# Altium PCB EX384.PcbDoc (part 1 of 2)
Units mil, origin at the board's own origin, x right, y up, seen from the top; angles counter-clockwise.
Board outline 2480 x 4575 mil, 2 copper layers (Top Layer, Bottom Layer), stack 64.8 mil thick; 53 components, 56 nets, 194 pads, 19 vias.
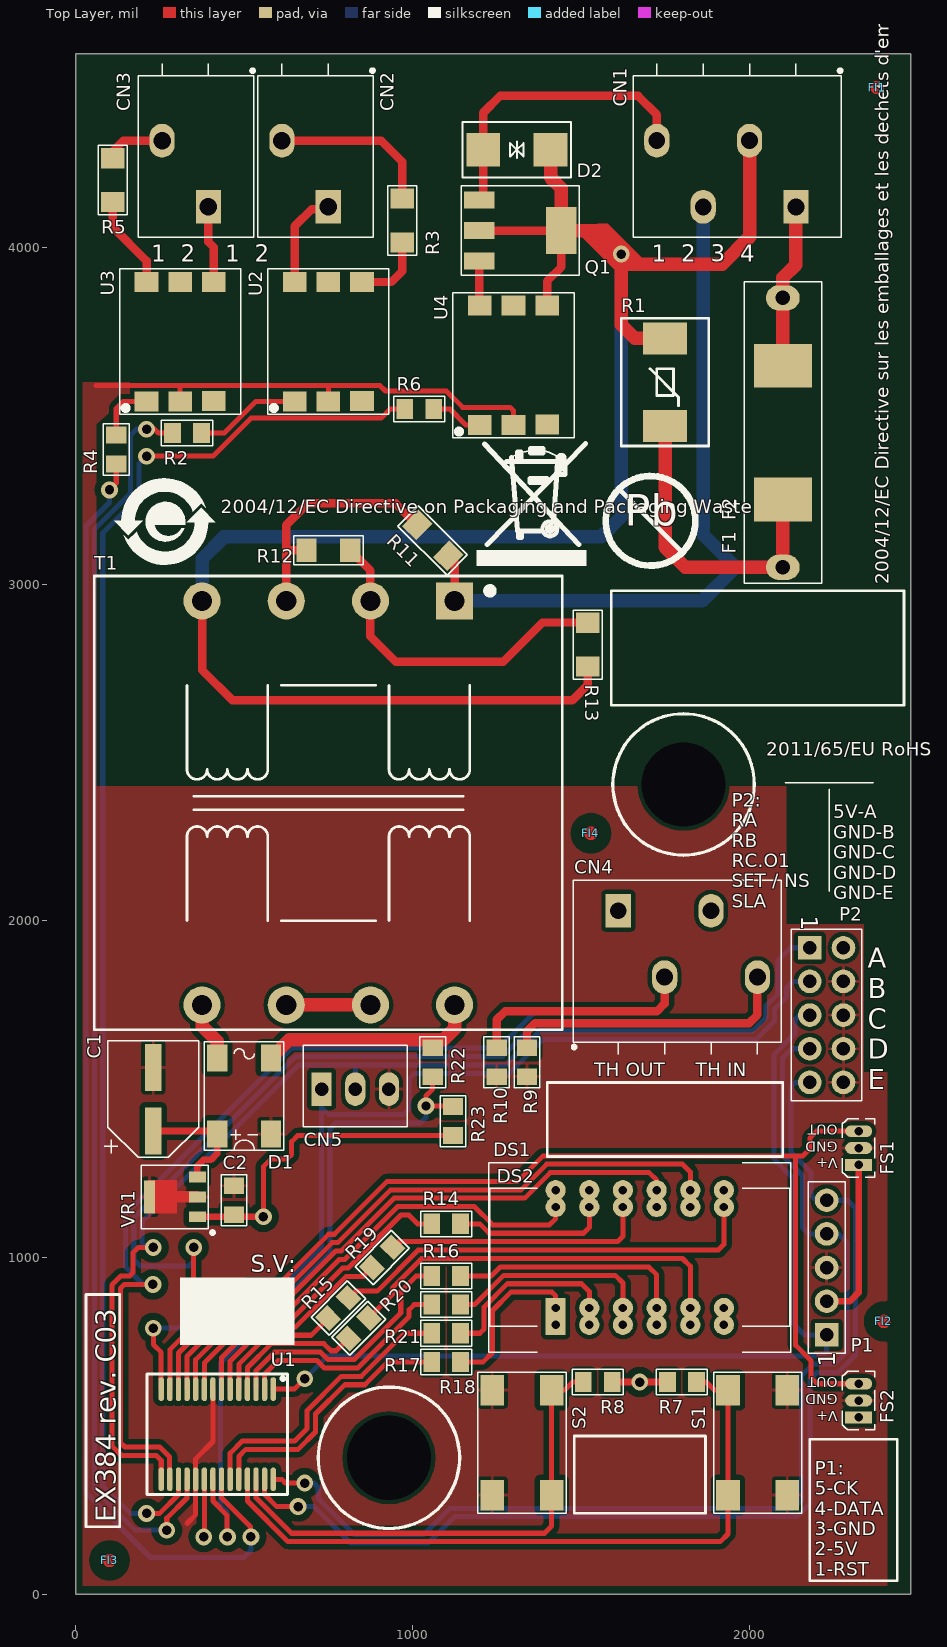
[diagram p0: Top Layer view]
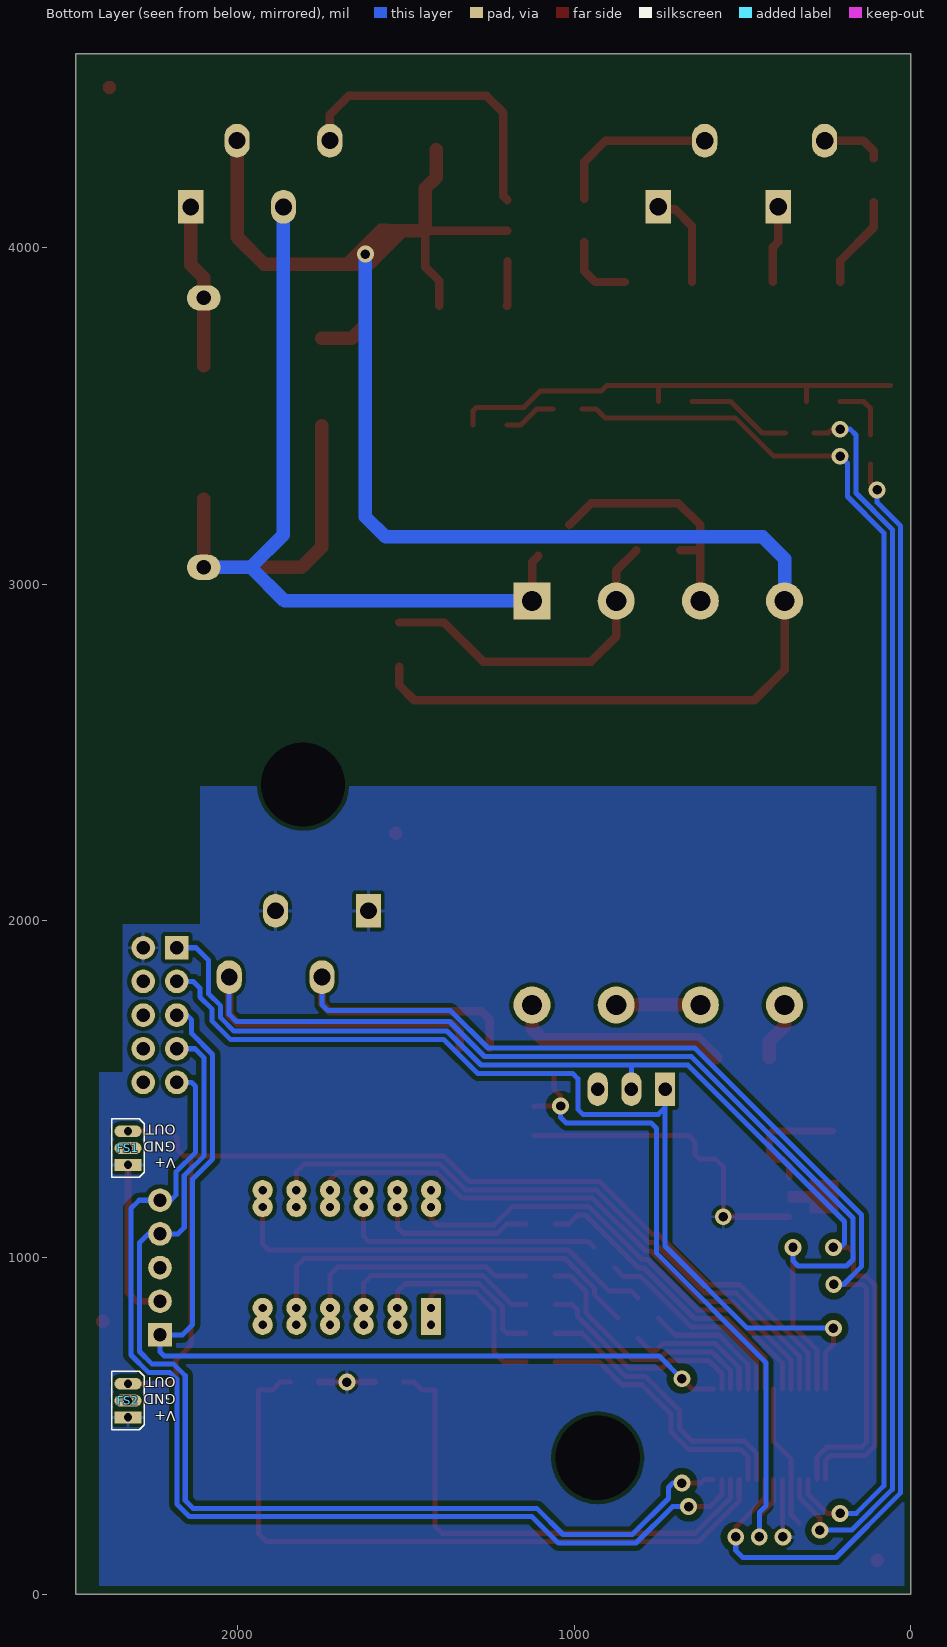
[diagram p1: Bottom Layer view, seen from below]

## Layer stack, top to bottom
Top Solder: solder mask 0.4, Solder Resist, Dk 3.5
Top Layer: signal copper 1.4
Dielectric 1: core 62, FR-4, Dk 4.2
Bottom Layer: signal copper 1.4
Bottom Solder: solder mask 0.4, Solder Resist, Dk 3.5

## Board outline
0,0 0,4575 2480,4575 2480,0

## Design rules (kind name [scope] priority, off if disabled: settings)
Clearance "300Volts no net" [IsPad and not InAnyNet vs InNetClass('300Volts')] p1: gap=0 ignorepadtopadclearanceinfootprint=FALSE
Clearance "Q1 pads" [IsPad and InComponent('Q1') vs InNet('NetCN1_2') or InNet('NetCN1_4') or InNet('NetQ1_3')] p2: gap=0 ignorepadtopadclearanceinfootprint=FALSE
Clearance "HV Ignore R13" [IsPad and InComponent('R13') vs IsPad and InComponent('R13')] p3: gap=0 ignorepadtopadclearanceinfootprint=FALSE
Clearance "HV Ignore R5" [IsPad and InComponent('R5') vs IsPad and InComponent('R5')] p4: gap=0 ignorepadtopadclearanceinfootprint=FALSE
Clearance "HV Ignore R3" [IsPad and InComponent('R3') vs IsPad and InComponent('R3')] p5: gap=0 ignorepadtopadclearanceinfootprint=FALSE
Clearance "HV Ignore D2" [IsPad and InComponent('D2') vs IsPad and InComponent('D2')] p6: gap=0 ignorepadtopadclearanceinfootprint=FALSE
Clearance "HV Ignore Q1" [(IsPad or IsTrack) and InComponent('Q1') vs (IsPad or IsTrack) and InComponent('Q1')] p7: gap=0 ignorepadtopadclearanceinfootprint=FALSE
Clearance "HV Ignore U4" [IsPad and InComponent('U4') vs IsPad and InComponent('U4')] p8: gap=0 ignorepadtopadclearanceinfootprint=FALSE
Clearance "HV Ignore U2" [IsPad and InComponent('U2') vs IsPad and InComponent('U2')] p9: gap=0 ignorepadtopadclearanceinfootprint=FALSE
Clearance "HV Ignore U3" [IsPad and InComponent('U3') vs IsPad and InComponent('U3')] p10: gap=0 ignorepadtopadclearanceinfootprint=FALSE
Clearance "HV Ignore R12" [IsPad and InComponent('R12') vs IsPad and InComponent('R12')] p11: gap=0 ignorepadtopadclearanceinfootprint=FALSE
Clearance "HV Ignore R11" [IsPad and InComponent('R11') vs IsPad and InComponent('R11')] p12: gap=0 ignorepadtopadclearanceinfootprint=FALSE
Clearance 300Volts [InNetClass('300Volts') vs Not InNetClass('300Volts')] p13: gap=216.54 ignorepadtopadclearanceinfootprint=FALSE
Clearance 300Volts_1 [InNetClass('300Volts') vs OnLayer('Top Layer')] p14: gap=120 ignorepadtopadclearanceinfootprint=FALSE except(0: Arc-Hole Track-Hole SMDPad-Hole THPad-Hole Via-Hole Fill-Hole Poly-Hole Region-Hole Text-Hole; 60: Arc-Track Track-Track Track-SMDPad Track-THPad Track-Via Track-Fill Track-Poly Track-Region Track-Text)
Clearance "300Volts tracks" [InNetClass('300Volts') and IsTrack vs InNetClass('300Volts') and IsTrack] p15: gap=60 ignorepadtopadclearanceinfootprint=FALSE except(0: Arc-Hole Track-Hole SMDPad-Hole THPad-Hole Via-Hole Fill-Hole Poly-Hole Region-Hole Text-Hole)
Clearance Clearance_2 [HasFootprint('Fiducial40mil')] p16: gap=40 ignorepadtopadclearanceinfootprint=FALSE except(0: Arc-Hole Track-Hole SMDPad-Hole THPad-Hole Via-Hole Fill-Hole Poly-Hole Region-Hole Text-Hole)
Clearance Clearance_1 [All] p17: gap=10 ignorepadtopadclearanceinfootprint=FALSE except(0: Arc-Hole Track-Hole SMDPad-Hole THPad-Hole Via-Hole Fill-Hole Poly-Hole Region-Hole Text-Hole; 8: Arc-SMDPad Track-SMDPad SMDPad-SMDPad; 12: THPad-Poly; 15: Arc-Poly Track-Poly SMDPad-Poly; 20: Via-Poly Fill-Poly Poly-Poly)
Clearance [OnLayer('Mechanical 13') vs IsNet] p18: gap=0 ignorepadtopadclearanceinfootprint=FALSE
Clearance Clearance_3 [All] p19: gap=0 ignorepadtopadclearanceinfootprint=FALSE
ComponentClearance ComponentClearance_1 [(HasFootprint('FUSE SMT') OR HasFootprint('FUSE THRU') OR HasFootprint('LED3x7 - 7') OR HasFootprint('LED3x7 - 10'))] p1: gap=0 collisioncheckmode=3 verticalgap=0 showdistances=FALSE
ComponentClearance [All] p2: gap=10 collisioncheckmode=3 verticalgap=10 showdistances=FALSE
HoleSize [All] p1: absolutevalues=TRUE maxlimit=250 minlimit=1 maxpercent=80.000 minpercent=20.000
MinimumSolderMaskSliver "U1 pads" [InPadClass('pads_U1') vs InPadClass('pads_U1')] p1: minsoldermaskwidth=1
MinimumSolderMaskSliver "FS pads" [InPadClass('pads_FS') vs InPadClass('pads_FS')] p2: minsoldermaskwidth=5
MinimumSolderMaskSliver [All] p3: minsoldermaskwidth=10
PlaneConnect [All] p1: planeconnectstyle=Relief reliefexpansion=20 reliefentries=4 reliefconductorwidth=30 reliefairgap=10
PolygonConnect [All] p1: connectstyle=Relief reliefconductorwidth=10 reliefentries=4 polygonreliefangle="90 Angle" airgapwidth=10
RoomDefinition EX384 [InComponentClass('EX384')] p1: confinementstyle=ConfineIn formatcopy=TRUE lockcomponents=FALSE outline 0,0 2480,0 2480,4575 0,4575
RoutingVias [All] p1: holewidth=28 width=50 viastyle="Through Hole" minholewidth=28 minwidth=50 maxholewidth=28 maxwidth=50
SilkToSolderMaskClearance [IsPad] p1: minsilkscreentomaskgap=5 clearancetoexposedcopper=TRUE
SolderMaskExpansion [All] p1: expansion=4
Width [All] p1: maxlimit=200 minlimit=10 preferedwidth=20 minimp=50.000000 maximp=50.000000 favimp=50.000000
25 further rules are at their usual default settings.

## Classes and differential pairs
pad class pads_FS: FS2-1 FS2-2 FS2-3
pad class pads_U1: U1-1 U1-2 U1-3 U1-4 U1-5 U1-6 U1-7 U1-8 U1-9 U1-10 U1-11 U1-12 U1-13 U1-14 U1-15 U1-16 U1-17 U1-18 U1-19 U1-20 U1-21 U1-22 U1-23 U1-24 U1-25 U1-26 U1-27 U1-28
net class 300Volts: NetCN1_1 NetCN1_2 NetCN1_3 NetCN1_4 NetCN2_1 NetCN2_2 NetCN3_1 NetCN3_2 NetQ1_3 NetR3_1 NetR5_1 NetR11_1 NetR12_2
net class C1_Nets: GND NetC1_1
net class C2_Nets: +5V GND
net class CN1_Nets: NetCN1_1 NetCN1_2 NetCN1_3 NetCN1_4
net class CN2_Nets: NetCN2_1 NetCN2_2
net class CN3_Nets: NetCN3_1 NetCN3_2
net class CN4_Nets: +5V NetCN4_2 NetCN4_4
net class CN5_Nets: GND NetCN5_1 NetCN5_2
net class D1_Nets: GND NetC1_1 NetD1_3 NetD1_4
net class D2_Nets: NetCN1_2 NetCN1_4
net class DS1_Nets: NetDS1_1 NetDS1_2 NetDS1_3 NetDS1_4 NetDS1_5 NetDS1_6 NetDS1_7 NetDS1_8 NetDS1_9 NetDS1_10 NetDS1_11 NetDS1_12
net class DS2_Nets: NetDS1_1 NetDS1_2 NetDS1_3 NetDS1_4 NetDS1_5 NetDS1_6 NetDS1_7 NetDS1_8 NetDS1_9 NetDS1_10 NetDS1_11 NetDS1_12
net class F1_Nets: NetCN1_1 NetCN1_3
net class F2_Nets: NetCN1_1 NetCN1_3
net class FS1_Nets: +5V GND NetFS1_3
net class FS2_Nets: +5V GND NetFS1_3
net class P1_Nets: +5V GND NetP1_1 NetP1_4 NetP1_5
net class P2_Nets: +5V GND NetCN5_1 NetCN5_2 NetP1_1 NetP1_4 NetP1_5
net class Q1_Nets: NetCN1_2 NetCN1_4 NetQ1_3
net class R1_Nets: NetCN1_2 NetCN1_3
net class R2_Nets: NetR2_1 NetR2_2
net class R3_Nets: NetCN2_2 NetR3_1
net class R4_Nets: NetR4_1 NetR4_2
net class R5_Nets: NetCN3_2 NetR5_1
net class R6_Nets: NetR6_1 NetR6_2
net class R7_Nets: +5V NetR7_2
net class R8_Nets: +5V NetR8_2
net class R9_Nets: GND NetCN4_4
net class R10_Nets: GND NetCN4_2
net class R11_Nets: NetCN1_3 NetR11_1
net class R12_Nets: NetR11_1 NetR12_2
net class R13_Nets: NetCN1_2 NetR12_2
net class R14_Nets: NetDS1_11 NetR14_2
net class R15_Nets: NetDS1_7 NetR15_2
net class R16_Nets: NetDS1_4 NetR16_2
net class R17_Nets: NetDS1_2 NetR17_2
net class R18_Nets: NetDS1_1 NetR18_2
net class R19_Nets: NetDS1_10 NetR19_2
net class R20_Nets: NetDS1_5 NetR20_2
net class R21_Nets: NetDS1_3 NetR21_2
net class R22_Nets: NetD1_3 NetR22_2
net class R23_Nets: +5V NetR22_2
net class S1_Nets: GND NetR7_2
net class S2_Nets: GND NetR8_2
net class T1_Nets: NetCN1_2 NetCN1_3 NetD1_3 NetD1_4 NetR11_1 NetR12_2 NetT1_6
net class U1_Nets: +5V GND NetCN4_2 NetCN4_4 NetCN5_1 NetCN5_2 NetDS1_8 NetDS1_9 NetDS1_12 NetFS1_3 NetP1_1 NetP1_4 NetP1_5 NetR2_1 NetR4_1 NetR6_1 NetR7_2 NetR8_2 NetR14_2 NetR15_2 NetR16_2 NetR17_2 NetR18_2 NetR19_2 NetR20_2 NetR21_2 NetR22_2
net class U2_Nets: GND NetCN2_1 NetR2_2 NetR3_1 NetU2_3 NetU2_5
net class U3_Nets: GND NetCN3_1 NetR4_2 NetR5_1 NetU3_3 NetU3_5
net class U4_Nets: GND NetCN1_2 NetQ1_3 NetR6_2 NetU4_3 NetU4_5
net class VR1_Nets: +5V GND NetC1_1

## Components (designator, comment, footprint, x,y, rotation, side; value= is the part's Value field where it differs from the comment)
C1 "CAP ALUM 220UF 20% 16V SMD" "R6.3x7.7 SMD" 230,1470 r90 top
C2 "CAP CER 100nF 25V NP0 0805" "0805 C" 470,1170 r270 top value=100nF
CN1 "TERM BLOCK PCB 4POS 3.5MM 300V 2A" "250A-4P (1212)" 2070,4270 r180 top
CN2 "TERM BLOCK PCB 2POS 3.5MM 300V 2A" "250A-2P (12)" 681,4270 r180 top
CN3 "TERM BLOCK PCB 2POS 3.5MM 300V 2A" "250A-2P (12)" 325,4270 r180 top
CN4 "TERM BLOCK PCB 4POS 3.5MM 300V 2A" "250A-4P (1212)" 1680,1880 r0 top
CN5 "3 Positions Header, Unshrouded Connector 0.100\" (2.54mm) Through Hole Tin" 640456-3 830,1500 r0 top
D1 "IC BRIDGE DIODE 1A 600V 4SMD" "4 SMD" 500,1480 r180 top locked
D2 "TVS DIODE 495VWM 760VC SMD" "DO-214AA (SMB)" 1410,4290 r180 top locked
DS1 "LED 3 x 7 segment 14x22.5mm" "LED3x7 - 10" 1675,1000 r0 top locked
DS2 "7-Segment LED Display, InfoVue, Red, 10 mA, 1.7 V, 6 mcd, 3, 7.1 mm" "LED3x7 - 7" 1675,1000 r0 top locked
F1 "FUSE 500MA 250VAC 125VDC SMT" "FUSE X2" 2100,3450 r270 top
F2 "FUSE GLASS 500MA 350VAC 140VDC" "FUSE THRU" 2100,3450 r270 top
FI1 "FIDUCIAL40" FIDUCIAL40mil 2380,4475 r0 top
FI2 "FIDUCIAL40" FIDUCIAL40mil 2400,810 r0 top
FI3 "FIDUCIAL40" FIDUCIAL40mil 100,100 r0 top
FI4 "FIDUCIAL40" FIDUCIAL40mil 1530,2260 r0 top
FS1 "IC SW HALL EFFECT 3SIP TO92" "TO-92 - FS" 2325,1325 r90 bottom
FS2 "IC SW HALL EFFECT 3SIP TO92" "TO-92 - FS" 2325,575 r90 bottom
P1 "Header, 5-Pin, .100 in spacing" HDR1x5 2230,970 r180 top
P2 "Header, 2x5-Pin, .100 in spacing" HDR2X5 2230,1720 r0 top
Q1 "TRIAC SENS GATE 800V 1A SOT223" SOT223 1320,4050 r270 top locked
R1 "Varistor 150VAC 400A 3225" "3225 MOV" 1750,3600 r90 top
R2 "RES SMD 510 OHM 1% 1/8W 0805" "0805 C" 330,3449 r0 top locked
R3 "RES SMD 332 OHM 1% 1/4W 1206" 1206 970,4080 r90 top locked
R4 "RES SMD 510 OHM 1% 1/8W 0805" "0805 C" 120,3400 r90 top locked
R5 "RES SMD 332 OHM 1% 1/4W 1206" 1206 110,4200 r90 top locked
R6 "RES SMD 510 OHM 1% 1/8W 0805" "0805 C" 1020,3520 r0 top locked
R7 "RES SMD 10K OHM 1% 1/8W 0805" "0805 C" 1800,630 r0 top locked
R8 "RES SMD 10K OHM 1% 1/8W 0805" "0805 C" 1550,630 r180 top locked
R9 "RES SMD 15K OHM 1% 1/8W 0805" "0805 C" 1340,1580 r270 top locked value=15K
R10 "RES SMD 15K OHM 1% 1/8W 0805" "0805 C" 1250,1580 r270 top locked value=15K
R11 "RES SMD 0.0 OHM JUMPER 1/4W 1206" 1206 1060,3130 r315 top
R12 "RES SMD 0.0 OHM JUMPER 1/4W 1206" 1206 750,3100 r0 top locked
R13 "RES SMD 0.0 OHM JUMPER 1/4W 1206" 1206 1520,2820 r90 top
R14 "RES SMD 2K OHM 1% 1/8W 0805" "0805 C" 1100,1100 r180 top locked
R15 "RES SMD 2K OHM 1% 1/8W 0805" "0805 C" 780,850 r225 top
R16 "RES SMD 2K OHM 1% 1/8W 0805" "0805 C" 1100,945 r180 top locked
R17 "RES SMD 2K OHM 1% 1/8W 0805" "0805 C" 1100,775 r180 top locked
R18 "RES SMD 2K OHM 1% 1/8W 0805" "0805 C" 1100,690 r180 top locked
R19 "RES SMD 2K OHM 1% 1/8W 0805" "0805 C" 910,1000 r225 top
R20 "RES SMD 2K OHM 1% 1/8W 0805" "0805 C" 840,790 r225 top
R21 "RES SMD 2K OHM 1% 1/8W 0805" "0805 C" 1100,860 r180 top locked
R22 "RES SMD 39K OHM 1% 1/8W 0805" "0805 C" 1060,1580 r270 top
R23 "RES SMD 220K OHM 1% 1/8W 0805" "0805 C" 1120,1405 r270 top locked
S1 "SWITCH TACTILE NO SMT 0.05A 12VDC" SW-PB 2025,450 r90 top
S2 "SWITCH TACTILE NO SMT 0.05A 12VDC" SW-PB 1325,450 r90 top locked
T1 "FS10-110-C2" FS10-110-C2 750,2350 r270 top
U1 "PIC16F1716-I/SS" SSOP-SS28_L 420,475 r270 top
U2 "OPTOISOLATOR TRIAC 6SMD" 6-SMD 750,3720 r0 top
U3 "OPTOISOLATOR TRIAC 6SMD" 6-SMD 310,3720 r0 top
U4 "OPTOISOLATOR TRIAC 6SMD" 6-SMD 1300,3650 r0 top
VR1 "IC REG LDO 5V 0.1A SOT89-3" SOT89-3 290,1180 r90 top

## Footprints (in the part's own frame and the unit in brackets; to place one, negate y for a bottom-side part, rotate by r counter-clockwise, add the part's x,y. Pads: shape width x height; smd on the part's side, far side on the other; paste and mask are expansions set on the pad)
"4 SMD" [mil] "4-MicroSMD, gull wing, 4-SMD"
  rect 60x80 smd: 1(80,113) 2(-80,113) 3(-80,-113) 4(80,-113)
  silkscreen extent -118,-161 118,161, body extent -100,-132 100,132, height 50
6-SMD [mm]
  rect 1.78x1.52 smd: 1(-2.54,-4.505) 2(0,-4.505) 3(2.54,-4.48) 4(2.54,4.505) 5(0,4.505) 6(-2.54,4.505)
  silkscreen extent -4.57,-5.46 4.57,5.49, body extent -4.44,-5.08 4.44,5.08, height 3.63
"250A-2P (12)" [mm]
  rect 1.905x2.54 hole 1.321: 1(-1.75,3.8)
  oval 1.905x2.54 hole 1.321: 2(1.75,-1.2)
  silkscreen extent -5.21,-7.01 3.56,6.1, body extent -5.05,-6 3.45,6, height 13.1
"250A-4P (1212)" [mm]
  rect 1.905x2.54 hole 1.27: 1(-1.75,3.8)
  oval 1.905x2.54 hole 1.27: 2(1.75,-1.2) 3(5.25,3.8) 4(8.75,-1.2)
  silkscreen extent -5.21,-7.01 10.54,6.1, body extent -5.05,-6 10.45,6, height 13.1
"0805 C" [mil]
  rect 50x60 smd: 1(-43,0) 2(43,0)
  silkscreen extent -76,-38 76,38, body extent -45,-27 45,27, height 30
1206 [mil]
  rect 60x70 smd: 1(-65,0) 2(65,0)
  silkscreen extent -103,-43 103,43, body extent -66,-34 66,34, height 33
"3225 MOV" [mil] "3225 DIODE TVS VOLTAGE SUPPRESSOR DIMENSIONS 8mm L x 6.3mm W x 3.2mm H"
  rect 95x130 smd: 1(-130,0) 2(130,0)
  silkscreen extent -190,-130 190,130, body extent -157,-124 157,124, height 140
640456-3 [mil] "3 Positions Header, Unshrouded Connector 0.100\" (2.54mm) Through Hole Tin"
  rect 60x100 hole 40: 1(-100,0)
  oval 60x100 hole 40: 2(0,0) 3(100,0)
  silkscreen extent -155,-111 155,130, body extent -150,-105 150,125, height 395
"DO-214AA (SMB)" [mil] "TVS diode surface mount"
  rect 100x100 smd: 1(0,0) 2(200,0)
  silkscreen extent -61,-82 261,82, body extent -4,-73 204,73, height 87
FIDUCIAL40mil [mil] "Fiducial 40 mil"
  Top Layer circle w20: c0,0 r10
FS10-110-C2 [mil]
  rect 110x110 hole 60: 1(-600,375)
  round 110 hole 60: 2(-600,125) 3(-600,-125) 4(-600,-375) 5(600,375) 6(600,125) 7(600,-125) 8(600,-375)
  silkscreen extent -674,-695 674,695, body extent -610,-687 610,688, height 937
"FUSE THRU" [mil] "Fuse glass/terminals thru hole"
  oval 75x100 hole 43: 1(-400,0) 2(400,0)
  silkscreen extent -448,-115 448,115, body extent -410,-110 410,110, height 220
"FUSE X2" [mil] "Fuse surface mount + glass/terminals thru hole"
  oval 75x100 hole 43: 1(-400,0) 2(400,0)
  rect 130x172 smd: 1(-198.6,0) 2(198.6,0)
  Top Layer lines w40: 400,0 198.6,0 ; -198.6,0 -400,0
  silkscreen extent -448,-115 448,115, body extent -410,-110 410,110, height 220
HDR1x5 [mil]
  rect 70x70 hole 40: 1(0,200)
  round 70 hole 40: 2(0,100) 3(0,0) 4(0,-100) 5(0,-200)
  silkscreen extent -55,-255 55,255, body extent -49,-250 49,250, height 336
HDR2X5 [mil]
  rect 70x70 hole 40: 1(-50,200)
  round 70 hole 40: 2(50,200) 3(-50,100) 4(50,100) 5(-50,0) 6(50,0) 7(-50,-100) 8(50,-100) 9(-50,-200) 10(50,-200)
  silkscreen extent -105,-255 104,255, body extent -99,-250 99,250, height 336
"LED3x7 - 7" [mil] "7 segment 3 digit LED display"
  rect 60x60 hole 25: 1(-250,-150)
  round 60 hole 25: 2(-150,-150) 3(-50,-150) 4(50,-150) 5(150,-150) 6(250,-150) 7(250,150) 8(150,150) 9(50,150) 10(-50,150) 11(-150,150) 12(-250,150)
  silkscreen extent -445,-205 445,205, body extent -440,-200 440,200, height 240
"LED3x7 - 10" [mil] "7 segment 3 digit LED display"
  rect 60x60 hole 25: 1(-250,-200)
  round 60 hole 25: 2(-150,-200) 3(-50,-200) 4(50,-200) 5(150,-200) 6(250,-200) 7(250,200) 8(150,200) 9(50,200) 10(-50,200) 11(-150,200) 12(-250,200)
  silkscreen extent -448,-281 448,281, body extent -443,-276 443,276, height 229
"R6.3x7.7 SMD" [mil]
  rect 140x50 smd: 1(-94.5,0) 2(94.5,0)
  silkscreen extent -173,-135 173,145, body extent -138,-130 138,130, height 272
SOT89-3 [mil]
  rect 32x50 smd: 1(-59,-71) 2(0,-71) 3(59,-71)
  rect 98x32 smd: 2(0,71)
  Top Layer region: -16,-75 -16,-10 -49,-10 -49,75 49,75 49,-10 16,-10 16,-75
  silkscreen extent -111,-121 94,95, body extent -89,-89 89,79, height 61
SOT223 [mil]
  rect 50x90 smd: 1(-90.6,-122) 2(0,-122) 3(90.6,-122)
  rect 140x90 smd: 2(0,122.1)
  silkscreen extent -133,-175 133,175, body extent -128,-140 128,140, height 65
SSOP-SS28_L [mm] "SOP, 28-Leads, Body 10.2x5.2mm, Pitch 0.65mm, IPC High Density"
  oval 1.8x0.406 smd: 1(-3.4,4.225) 2(-3.4,3.575) 3(-3.4,2.925) 4(-3.4,2.275) 5(-3.4,1.625) 6(-3.4,0.975) 7(-3.4,0.325) 8(-3.4,-0.325) 9(-3.4,-0.975) 10(-3.4,-1.625) 11(-3.4,-2.275) 12(-3.4,-2.925) 13(-3.4,-3.575) 14(-3.4,-4.225) 15(3.4,-4.225) 16(3.4,-3.575) 17(3.4,-2.925) 18(3.4,-2.275) 19(3.4,-1.625) 20(3.4,-0.975) 21(3.4,-0.325) 22(3.4,0.325) 23(3.4,0.975) 24(3.4,1.625) 25(3.4,2.275) 26(3.4,2.925) 27(3.4,3.575) 28(3.4,4.225)
  silkscreen extent -4.55,-5.3 4.55,5.3, body extent -3.9,-5.1 3.9,5.1, height 1.9
SW-PB [mil]
  rect 90x70 smd: 1(-156,88) 2(156,88) 3(-156,-88) 4(156,-88)
  silkscreen extent -209,-131 209,131, body extent -197,-118 197,118, height 200
"TO-92 - FS" [mil] "Customized for the flow sensor"
  rect 35x80 hole 25: 1(-50,0)
  oval 35x80 hole 25: 2(0,0) 3(50,0)
  silkscreen extent -87,-48 87,48, body extent -82,-23 82,39, height 342

## Part data
C1: library part CAPEL220UF20%16VSMDG, Capacitance=220µF, Lifetime @ Temp.="1000 Hrs @ 105°C", Manufacturer=Generic, Operating Temperature="-55°C ~ 105°C", Package / Case="Radial, Can - SMD", Ripple Current=105mA, Tolerance=±20%, Voltage Rating=16V, Applications="General Purpose", Category=Capacitors, Mounting Type="Surface Mount", Packaging="Tape & Reel (TR)", RoHS="RoHS Compliant", Surface Mount Land Size="0.260\" L x 0.260\" W (6.60mm x 6.60mm)"
C2: library part CAPCER100NF10%25V0805G, Capacitance=100nF, Manufacturer=Generic, Operating Temperature="-55°C ~ 125°C", Package / Case="0805 (2012 Metric)", Temperature Coefficient="C0G, NP0", Tolerance=±10%, Voltage - Rated=25V, Applications="General Purpose", Category=Capacitors, Mounting Type="Surface Mount, MLCC", RoHS="RoHS Compliant"
CN1 CN4: library part CONNTB4POS300V2A, Voltage=300V, Category="Connectors, Interconnects", Mating Orientation="45° (135°) Angle with Board", Mounting Type="Through Hole", Number of Levels=1, Pitch="0.138\" (3.50mm)", Positions Per Level=4, RoHS="RoHS Compliant", Wire Gauge="16-24 AWG", Wire Termination="Screwless - Spring Cage, Tension Clamp"
CN2 CN3: library part CONNTB2POS300V2A, Category="Connectors, Interconnects", Mating Orientation="45° (135°) Angle with Board", Mounting Type="Through Hole", Number of Levels=1, Packaging=Bulk, Pitch="0.138\" (3.50mm)", Positions Per Level=2, RoHS="RoHS Compliant", Wire Gauge="16-24 AWG", Wire Termination="Screwless - Spring Cage, Tension Clamp"
CN5: library part CONNMTA1003POS, Color=Natural, Manufacturer="TE Connectivity AMP Connectors", Manufacturer part number=640456-3, Category="Connectors, Interconnects", ComponentLink1Description=http://www.te.com/commerce/DocumentDelivery/DDEController?Action=srchrtrv&DocNm=640456&DocType=Customer+Drawing&DocLang=English, ComponentLink1URL=http://www.te.com/commerce/DocumentDelivery/DDEController?Action=srchrtrv&DocNm=640456&DocType=Customer+Drawing&DocLang=English, Connector Type="Header, Unshrouded", Contact Finish=Tin, Contact Finish Thickness=-, Contact Mating Length="0.295\" (7.49mm)", Contact Type="Male Pin", Fastening Type="Friction Lock", Features=-, Mounting Type="Through Hole", Number of Positions=3, Number of Positions Loaded=All, Number of Rows=1, Packaging=Bulk, Part Status=Active, Pitch="0.100\" (2.54mm)", Pricing 1="1=0.13, 10=0.119, 100=0.095, 500=0.088, 1000=0.081, 2000=0.075, 5000=0.07, 10000=0.056, 25000=0.052 (USD)", RoHS="RoHS Compliant", Row Spacing=-, Termination=Solder
D1: library part BRIDGE1A600V4SMD, Current - DC Forward (If) (Max)=1A, Package / Case="4-SMD, Gull Wing", Voltage - Peak Reverse (Max)=600V, Category="Discrete Semiconductor Products", Diode Type="Single Phase", Mounting Type="Surface Mount", Packaging="Tape & Reel (TR)", RoHS="RoHS Compliant"
D2: library part TVS495VWM800MA600WSMD, Capacitance @ Frequency=-, Current - Peak Pulse (10/1000µs)=800mA, Operating Temperature="-55°C ~ 150°C (TJ)", Package / Case="DO-214AA, SMB", Power - Peak Pulse=600W, Power Line Protection=No, Supplier Device Package="DO-214AA (SMB)", Voltage - Breakdown (Min)=522.5V, Voltage - Clamping (Max) @ Ipp=760V, Voltage - Reverse Standoff (Typ)=495V, Applications="General Purpose", Bidirectional Channels=1, Category="Circuit Protection", Mounting Type="Surface Mount", RoHS="RoHS Compliant", Type=Zener, Unidirectional Channels=-
DS1: library part DISLED3x7S14x22.5MM
DS2: library part DISLED3x7S10x22.5MM, Forward Current If=10, Forward Voltage=1.7, LED Color=Red, Character Size=7.1, Common Connection="Common Anode", Luminous Intensity=6, No. of Digits / Alpha=3, Packaging=Each, Product Range=-, RoHS=YES
F1: library part FUSE500MA250VACSM, Breaking Capacity @ Rated Voltage=50A, Current Rating=500mA, DC Cold Resistance="1.2 Ohm", Operating Temperature="-55°C ~ 125°C", Package / Case="2-SMD, Square End Block", Voltage Rating - AC=250V, Voltage Rating - DC=125V, Approvals="CE, CSA, cURus", Category="Circuit Protection", Fuse Type="Cartridge, Glass", Melting I²t=0.0415, Mounting Type="Through Hole", Response Time=Fast, RoHS="RoHS Compliant", Size / Dimension="0.405\" L x 0.109\" W x 0.109\" H (10.29mm x 2.77mm x 2.77mm)"
F2: library part FUSE500MA350VACTH, Breaking Capacity @ Rated Voltage="100A AC, 150A DC", Current Rating=500mA, DC Cold Resistance="0.33 Ohm", Operating Temperature="-55°C ~ 125°C", Package / Case="2AG, 5mm x 15mm (Axial)", Voltage Rating - AC=350V, Voltage Rating - DC=140V, Approvals="CE, CSA, cURus", Category="Circuit Protection", Fuse Type="Cartridge, Glass", Melting I²t=0.1, Mounting Type="Through Hole", Response Time=Fast, RoHS="RoHS Compliant", Size / Dimension="0.217\" Dia x 0.591\" L (5.50mm x 15.00mm)"
FS1 FS2: library part HALL5.5MTTO92, Current - Output (Max)=20mA, Current - Supply (Max)=6mA, Operating Temperature="-40°C ~ 125°C (TA)", Package / Case="TO-226-3, TO-92-3 (TO-226AA)", Voltage - Supply="3 V ~ 24 V", Category="Sensors, Transducers", Features="Temperature Compensated", Function=Latch, Output Type="Open Collector", Packaging=Bulk, RoHS="RoHS Compliant", Sensing Range="5.5mT Trip, -5.5mT Release", Technology="Hall Effect", Test Condition="-40°C ~ 125°C"
P1: library part H5S100G, Manufacturer=Generic, LatestRevisionDate=17-Jul-2002, LatestRevisionNote="Re-released for DXP Platform.", Publisher="Altium Limited"
P2: library part H5x2S100G, Manufacturer=Generic, LatestRevisionDate=17-Jul-2002, LatestRevisionNote="Re-released for DXP Platform.", Publisher="Altium Limited"
Q1: library part TRIAC800V1ASOT223, Current - Gate Trigger (Igt) (Max)=7mA, Current - Hold (Ih) (Max)=10mA, Current - Non Rep. Surge 50, 60Hz (Itsm)=16A, Current - On State (It (RMS)) (Max)=1A, Package / Case=SOT223, Voltage - Gate Trigger (Vgt) (Max)=1.3V, Voltage - Off State=800V, Category="Discrete Semiconductor Products", Configuration=Single, Mounting Type="Surface Mount", RoHS="RoHS Compliant", Supplier Device Package=SOT223, Triac Type="Logic - Sensitive Gate"
R1: library part MOV150VAC400A3225, Manufacturer="Thinking Electronics", Manufacturer part number=MVS3225P241, Power Rating (W)=0.1, Reference Capacitance (pF)=90, Surge Current Max (A @ 8/20 us)=400, Varistor Voltage (V @ 1mA DC)=240, Voltage Clamping Max (V @ 5A @ 8/20 us)=395, Voltage Continuous Max (VAC/VDC)=150/200, Energy Max (J @ 10/1000 us)=9
R2 R4 R6: library part R510R1%0805G, Manufacturer=Generic, Operating Temperature="-55°C ~ 155°C", Package / Case="0805 (2012 Metric)", Power (Watts)="0.125W, 1/8W", Resistance (Ohms)=510, Supplier Device Package=0805, Temperature Coefficient=±100ppm/°C, Tolerance=±1%, Category=Resistors, Composition="Thick Film", Height="0.028\" (0.70mm)", Number of Terminations=2, RoHS="RoHS Compliant", Size / Dimension="0.079\" L x 0.049\" W (2.00mm x 1.25mm)"
R3 R5: library part R332R1%1206G, Manufacturer=Generic, Operating Temperature="-55°C ~ 155°C", Package / Case="1206 (3216 Metric)", Power (Watts)="0.25W, 1/4W", Resistance (Ohms)=332R, Temperature Coefficient=±100ppm/°C, Tolerance=±1%, Category=Resistors, Composition="Thick Film", Height="0.024\" (0.60mm)", Number of Terminations=2, RoHS="RoHS Compliant", Size / Dimension="0.126\" L x 0.063\" W (3.20mm x 1.60mm)", Supplier Device Package="1206 (3216 Metric)"
R7 R8: library part R010K1%0805G, Manufacturer=Generic, Operating Temperature="-55°C ~ 155°C", Package / Case="0805 (2012 Metric)", Power (Watts)="0.125W, 1/8W", Resistance (Ohms)=10k, Supplier Device Package=0805, Temperature Coefficient=±100ppm/°C, Tolerance=±1%, Category=Resistors, Composition="Thick Film", Features="Moisture Resistant", Height="0.024\" (0.60mm)", Number of Terminations=2, RoHS="RoHS Compliant", Size / Dimension="0.079\" L x 0.049\" W (2.00mm x 1.25mm)"
R9 R10: library part R015K1%0805G, Manufacturer=Generic, Operating Temperature="-55°C ~ 155°C", Package / Case="0805 (2012 Metric)", Power (Watts)="0.125W, 1/8W", Resistance (Ohms)=15K, Supplier Device Package=0805, Temperature Coefficient=±100ppm/°C, Tolerance=±1%, Category=Resistors, Composition="Thick Film", Features="Moisture Resistant", Number of Terminations=2, RoHS="RoHS Compliant", Size / Dimension="0.079\" L x 0.049\" W (2.00mm x 1.25mm)"
R11 R12 R13: library part R000R0%1206G, Manufacturer=Generic, Operating Temperature="-55°C ~ 155°C", Package / Case="1206 (3216 Metric)", Power (Watts)="0.25W, 1/4W", Resistance (Ohms)=0.0, Supplier Device Package=1206, Temperature Coefficient=-, Tolerance=Jumper, Category=Resistors, Composition="Thick Film", Features="Moisture Resistant", Height="0.026\" (0.65mm)", Number of Terminations=2, RoHS="RoHS Compliant", Size / Dimension="0.122\" L x 0.063\" W (3.10mm x 1.60mm)"
R14 R15 R16 R17 R18 R19 R20 R21: library part R002K1%0805G, Manufacturer=Generic, Operating Temperature="-55°C ~ 155°C", Package / Case="0805 (2012 Metric)", Power (Watts)="0.125W, 1/8W", Resistance (Ohms)=2k, Supplier Device Package=0805, Temperature Coefficient=±100ppm/°C, Tolerance=±1%, Category=Resistors, Composition="Thick Film", Features="Moisture Resistant", Height="0.024\" (0.60mm)", Number of Terminations=2, RoHS="RoHS Compliant", Size / Dimension="0.079\" L x 0.049\" W (2.00mm x 1.25mm)"
R22: library part R039K1%0805G, Manufacturer=Generic, Operating Temperature="-55°C ~ 155°C", Package / Case="0805 (2012 Metric)", Power (Watts)="0.125W, 1/8W", Resistance (Ohms)=39k, Supplier Device Package=0805, Temperature Coefficient=±100ppm/°C, Tolerance=±1%, Category=Resistors, Composition="Thick Film", Features="Moisture Resistant", Height - Seated (Max)="0.024\" (0.60mm)", Number of Terminations=2, RoHS="RoHS Compliant", Size / Dimension="0.079\" L x 0.049\" W (2.00mm x 1.25mm)"
R23: library part R220K1%0805G, Manufacturer=Generic, Operating Temperature="-55°C ~ 155°C", Package / Case="0805 (2012 Metric)", Power (Watts)="0.125W, 1/8W", Resistance (Ohms)=220k, Supplier Device Package=0805, Temperature Coefficient=±100ppm/°C, Tolerance=±1%, Category=Resistors, Composition="Thick Film", Features="Moisture Resistant", Height - Seated (Max)="0.024\" (0.60mm)", Number of Terminations=2, RoHS="RoHS Compliant", Size / Dimension="0.079\" L x 0.049\" W (2.00mm x 1.25mm)"
S1 S2: library part SWSMT5MM005A12VDC, Contact Rating @ Voltage="0.05A @ 24VDC", Actuator Height off PCB, from Pins=5.00mm, Outline="6.00mm x 6.00mm", Switch Travel=0.25mm
T1: "XFRMR LAMINATED 1.1VA THRU HOLE", Current - Output (Max)="Parallel 220mA, Series 110mA", Manufacturer="Triad Magnetics", Manufacturer part number=FS10-110-C2-B, Power - Max="1.1 VA", Supplier Part Number 1=237-1578-ND, Voltage - Isolation=4200Vrms, Voltage - Primary="115V, 230V", Voltage - Secondary (Full Load)="Parallel 5V, Series 10V", Category=Transformers, Center Tap=No, ComponentLink1Description=http://catalog.triadmagnetics.com/Asset/FS10-110-C2.pdf, ComponentLink1URL=http://catalog.triadmagnetics.com/Asset/FS10-110-C2.pdf, Height - Seated (Max)=23.80mm, Mounting Type="Through Hole", Pricing 1="1=4.69, 10=3.798, 25=3.0704, 50=2.8764, 100=2.7472, 250=2.6664, 500=2.5856, 1000=2.5048, 5000=2.3028 (USD)", Primary Winding(s)=Dual, RoHS="RoHS Compliant", Secondary Winding(s)=Dual, Size / Dimension="34.93mm L x 28.58mm W", Stock 1=801, Supplier 1=Digi-Key, Termination Style="PC Pin", Type="Laminated Core"
U1: "IC MCU 8BIT 14KB FLASH 28SSOP", Manufacturer="Microchip Technology", Manufacturer part number=PIC16F1716T-I/SS, Operating Temperature="-40°C ~ 85°C (TA)", Package / Case="28-SSOP (0.209\", 5.30mm Width)", Supplier Device Package=28-SSOP, Supplier Part Number 1=PIC16F1716T-I/SS-ND, Voltage - Supply (Vcc/Vdd)="2.3 V ~ 5.5 V", Category="Integrated Circuits (ICs)", ComponentLink1Description=http://www.microchip.com/mymicrochip/filehandler.aspx?ddocname=en566662, ComponentLink1URL=http://www.microchip.com/mymicrochip/filehandler.aspx?ddocname=en566662, Connectivity="I²C, LIN, SPI, UART/USART", Core Processor=PIC, Core Size=8-Bit, Data Converters="A/D 17x10b, D/A 1x5b, 1x8b", EEPROM Size=-, Number of I/O=25, Oscillator Type=Internal, Packaging="Tape & Reel (TR)", Peripherals="Brown-out Detect/Reset, POR, PWM, WDT", Pricing 1="2100=1.14 (USD)", Program Memory Size="14KB (8K x 14)", Program Memory Type=FLASH, RAM Size="1K x 8", RoHS="RoHS Compliant", Speed=32MHz, Stock 1=0, Supplier 1=Digi-Key
U2 U3 U4: library part OPTO6SMD, Current - DC Forward (If) (Max)=60mA, Current - Hold (Ih)="500µA (Typ)", Current - LED Trigger (Ift) (Max)=5mA, Current - On State (It (RMS)) (Max)=-, Operating Temperature="-40°C ~ 85°C", Package / Case="6-SMD, Gull Wing", Voltage - Off State=600V, Mounting Type="Surface Mount", Number of Channels=1, Output Type=Triac, RoHS="RoHS Compliant", Static dV/dt (Min)=600V/µs, Turn On Time=-
VR1: library part VREG78L05V100MA, Current - Limit (Min)=-, Current - Output=100mA, Operating Temperature="0°C ~ 125°C", Package / Case=TO-243AA, Supplier Device Package=SOT-89-3, Voltage - Dropout (Typical)="1.7V @ 40mA", Voltage - Input="Up to 30V", Voltage - Output=5V, Category="Integrated Circuits (ICs)", IOut=100mA, Mounting Type="Surface Mount", Number of Regulators=1, Regulator Topology="Positive Fixed", RoHS="RoHS Compliant", VOut=5V

## Free pads (board coordinates)
  round 220 hole 250: ""(930,405) ""(1805,2405)

## Via types
v1: diameter 50, hole 28, Top Layer to Bottom Layer, 19 vias

## Nets (pads, with @x,y where several pads share a name; then routed paths per layer and width w, separated by ;. In a path a pad name is that pad's centre, name@x,y a point inside that pad or via, vN(x,y) a via of type N, cw(c..) or ccw(c..) an arc to the next point about the centre after c; other vN are vias at no path point)
+5V: C2.2 CN4.1 CN4.3 FS1.1 FS2.1 P1.2 P2.2 R7.1 R8.1 R23.2 U1.20 VR1.1 | length 1788
  Top Layer w15: v1@381.61,170 U1.20 ; v1(557,1121) 557,1269.44 580.56,1293 628,1293 641,1306 641,1344 659,1362 R23.2
  Top Layer w20: VR1.1 v1(557,1121) ; R8.1 v1(1675,630) R7.1 ; P1.2 2299,870 2325,896 FS1.1
  other v1: 380,170
GND: C1.2 C2.1 CN5.3 D1.2 FS1.2 FS2.2 P1.3 P2.4 P2.6 P2.8 P2.10 R9.2 R10.2 S1.3 S1.4 S2.1 S2.2 U1.8 U1.19 U2.2 U3.2 U4.2 VR1.2 | length 1839
  Top Layer w15: 60,3590 310,3590 ; U3.2 310,3590 ; 330,210 356.02,236.02 U1.19 356.02,402.02 407.2,453.2 U1.8 ; U2.2 750,3590 ; U4.2 1300,3515 1290,3525 1149,3525 1100.59,3573.41 919.59,3573.41 903,3590 750,3590 ; 310,3590 750,3590
NetC1_1: C1.1 D1.1 VR1.3 | length 358.8
  Top Layer w20: C1.1 411.5,1375.5 D1.1 420,1309 401,1290 379,1290 361,1272 VR1.3
NetCN1_1: CN1.1 F1.1 F2.1 | length 286.5
  Top Layer w40: F2.1 2100,3910 2138.9,3948.9 CN1.1
NetCN1_2: CN1.2 D2.1 Q1.2 R1.2 R13.1 T1.4 U4.4 | length 5676
  Top Layer w25: T1.4 375,2745 465,2655 1475,2655 1519.99,2699.99 R13.1@1519.99,2754.06 ; Q1.2@1198,4050 1442.1,4050 1442.1,3942.1 1400,3900 U4.4
  Top Layer w40: D2.1 1410,4207.95 1442.1,4175.85 1442.1,4050 1550,4050 v1(1620,3980) ; R1.2 1660,3730 1620,3770 v1(1620,3980) ; CN1.2 2001.1,4031.1 1920,3950 1650,3950 v1(1620,3980)
  Bottom Layer w40: T1.4 375,3075 440,3140 1560,3140 1620,3200 v1(1620,3980)
NetCN1_3: CN1.3 F1.2 F2.2 R1.1 R11.2 T1.1 | length 3003.6
  Top Layer w25: R11.2 1125,3065 T1.1
  Top Layer w40: R1.1 1750,3110 1810,3050 F2.2
  Bottom Layer w40: T1.1 1860,2950 1960,3050 ; CN1.3 1863.31,3146.69 1960,3050 ; F2.2 1960,3050
NetCN1_4: CN1.4 D2.2 Q1.1 | length 900.8
  Top Layer w25: Q1.1 1210,4152.6 D2.2 1210,4400 1260,4450 1670,4450 1725.51,4394.49 CN1.4
NetCN2_1: CN2.1 U2.6 | length 302.3
  Top Layer w25: U2.6 650,4063 700.89,4113.89 756.4,4113.89 CN2.1@762.9,4120.39
NetCN2_2: CN2.2 R3.2 | length 493.1
  Top Layer w25: CN2.2 906.76,4317.24 970,4254 R3.2
NetCN3_1: CN3.1 U3.4 | length 229.7
  Top Layer w25: CN3.1 393.9,4016.1 410,4000 U3.4
NetCN3_2: CN3.2 R5.2 | length 180
  Top Layer w25: R5.2 110,4286 141.24,4317.24 CN3.2
NetCN4_2: CN4.2 R10.1 U1.16 | length 3673.7
  Top Layer w15: v1@230,920 v1(229,920) 144,920 132,908 132,451 146,437 249,437 278.66,407.34 278.66,341.14 U1.16
  Top Layer w25: R10.1 1250,1706 1275,1731 1726,1731 1748.9,1753.9 CN4.2
  Bottom Layer w15: v1@230,920 v1(229,920) 199.64,920 147,972.64 147,1127.36 641.64,1622 1256,1622 1367,1733 1731,1733 1748.9,1750.9 CN4.2
NetCN4_4: CN4.4 R9.1 U1.13 | length 3885.1
  Top Layer w15: U1.13 279.25,725.9 350,796.64 v1(350,1030)
  Top Layer w25: R9.1 1340,1672 1364,1696 2000,1696 2024.49,1720.49 CN4.4
  Bottom Layer w15: v1(350,1030) 350,990.03 334.97,975 191,975 172,994 172,1117 652,1597 1266.36,1597 1370.36,1701 2003.29,1701 2024.49,1722.2 CN4.4
NetCN5_1: CN5.1 P2.3 U1.14 | length 2969.5
  Top Layer w15: v1(230,790) 230,741.79 253.51,718.28 253.51,609.01 U1.14
  Bottom Layer w15: v1(230,790) 486,790 730,1034 730,1445 ; CN5.1 730,1445 ; P2.3 2131,1820 2111,1800 2111,1773 2075,1737 2075,1702 2021,1648 1388.07,1648 1287.07,1547 1005,1547 989,1531 989,1440 974,1425 750,1425 730,1445
NetCN5_2: CN5.2 P2.1 U1.15 | length 3475.5
  Top Layer w15: v1(230,1030) 186,1030 170,1014 170,955 160,945 133.64,945 107,918.36 107,440.64 135.64,412 238.64,412 253.66,396.98 U1.15
  Bottom Layer w15: v1(230,1030) 209,1030 197,1042 197,1106.64 662.36,1572 830,1572 ; CN5.2 830,1572 ; P2.1 2123,1920 2086,1883 2086,1783.36 2050,1747.36 2050,1712.36 2010.64,1673 1377.71,1673 1276.71,1572 830,1572
NetD1_3: D1.3 R22.1 T1.5 | length 651
  Top Layer w40: D1.3 634,1647 1092,1647 1125,1680 T1.5
NetD1_4: D1.4 T1.8 | length 175.6
  Top Layer w40: T1.8 375,1687 420,1642 D1.4
NetDS1_1: DS1.1 DS2.1 R18.1 | length 531.5
  Top Layer w15: R18.1 1210,690 1237.74,717.74 1237.74,842.74 1292,897 1414,897 1425,886 DS1.1
NetDS1_2: DS1.2 DS2.2 R17.1 | length 589.7
  Top Layer w15: R17.1 1200,775 1212.74,787.74 1212.74,853.09 1281.64,922 1502,922 1525,899 DS1.2
NetDS1_3: DS1.3 DS2.3 R21.1 | length 651.6
  Top Layer w15: R21.1 1184.29,860 1271.29,947 1602,947 1625,924 DS1.3
NetDS1_4: DS1.4 DS2.4 R16.1 | length 751.7
  Top Layer w15: R16.1 1233.93,945 1260.93,972 1702,972 1725,949 DS1.4
NetDS1_5: DS1.5 DS2.5 R20.1 | length 1222.8
  Top Layer w15: R20.1 940,890 940,909.64 1027.36,997 1802,997 1825,974 DS1.5
NetDS1_6: DS1.6 DS2.6 | length 50
  Top Layer w15: DS1.6 DS2.6
NetDS1_7: DS1.7 DS2.7 R15.1 | length 1341.3
  Top Layer w15: R15.1 830,900 895,900 1017,1022 1908,1022 1925,1039 DS1.7
NetDS1_8: DS1.8 DS2.8 U1.11 | length 1891.9
  Top Layer w15: U1.11 330.43,706.28 518.16,894 611.36,894 761.36,1044 777.93,1044 934.93,1201 1322.64,1201 1398.64,1277 1802,1277 1825,1254 DS1.8
NetDS1_9: DS1.9 DS2.9 U1.10 | length 1725.8
  Top Layer w15: U1.10 356.02,696.51 528.51,869 621.71,869 771.71,1019 788.29,1019 945.29,1176 1333,1176 1409,1252 1703,1252 1725,1230 DS1.9
NetDS1_10: DS1.10 DS2.10 R19.1 | length 835.1
  Top Layer w15: R19.1 957,1047 1609,1047 1625,1063 DS1.10
NetDS1_11: DS1.11 DS2.11 R14.1 | length 511.6
  Top Layer w15: R14.1 1199.64,1100 1227.64,1072 1508,1072 1525,1089 DS1.11
NetDS1_12: DS1.12 DS2.12 U1.9 | length 1428.4
  Top Layer w15: U1.9 381.61,686.75 538.87,844 632.07,844 782.07,994 798.64,994 955.64,1151 1184,1151 1238,1097 1407,1097 1425,1115 DS1.12
NetFS1_3: FS1.3 FS2.3 U1.12 | length 3245.1
  Top Layer w15: U1.12 304.84,716.04 507.8,919 601,919 751,1069 767.58,1069 924.58,1226 1312.29,1226 1388.29,1302 2160,1302 2180,1322 2180,1355 2200,1375 FS1.3 ; 2138,1301 2138,739 2183,694 2183,644 2202,625 FS2.3
NetP1_1: P1.1 P2.5 U1.1 | length 2854.3
  Top Layer w15: U1.1 648.86,608.86 v1(680,640)
  Bottom Layer w15: v1(680,640) 748,708 2218,708 2230,720 P1.1 2164,770 2133,801 2133,1233 2074,1292 2074,1603 2136,1665 2136,1705.78 2150.22,1720 P2.5
NetP1_4: P1.4 P2.7 U1.28 | length 3329.5
  Top Layer w15: U1.28 611.86,341.14 623,330 v1(680,330)
  Bottom Layer w15: v1(680,330) 707,330 720,317 720,284 827,177 1033.06,177 1111.06,255 2132,255 2155,278 2155,648.64 2189.36,683 2253,683 2291,721 2291,1044 2265,1070 P1.4 2176.97,1070 2158,1088.97 2158,1243.36 2099,1302.36 2099,1592.64 2126.36,1620 P2.7
NetP1_5: P1.5 P2.9 U1.27 | length 3301.4
  Top Layer w15: U1.27 560.75,296.25 597,260 v1(660,260)
  Bottom Layer w15: v1(660,260) 708,260 816,152 1047,152 1125,230 2142.36,230 2180,267.64 2180,638.29 2199.71,658 2263.36,658 2316,710.64 2316,1146 2292,1170 P1.5 2197.91,1170 2183,1184.91 2183,1253.71 2124,1312.71 2124,1508 2136,1520 P2.9
NetQ1_3: Q1.3 U4.6 | length 134
  Top Layer w25: Q1.3 1198,3827.36 U4.6
NetR2_1: R2.1 U1.18 | length 3753.4
  Top Layer w15: v1(210,3460) 234,3460 245,3449 R2.1 ; v1(270,190) 270,225.64 330,285.64 330,340.71 U1.18
  Bottom Layer w15: v1(210,3460) 180,3460 163,3443 163,3270.36 55,3162.36 55,311.36 176.36,190 v1(270,190)
NetR2_2: R2.2 U2.1 | length 315.8
  Top Layer w15: R2.2 441,3449 534.64,3542.64 U2.1
NetR3_1: R3.1 U2.4 | length 218.5
  Top Layer w25: U2.4 937.36,3897.36 970,3930 R3.1
NetR4_1: R4.1 U1.22 | length 3919.4
  Top Layer w15: v1(100,3280) 120,3300 R4.1 ; U1.22 432.8,286.2 519,200 v1@519,169
  Bottom Layer w15: v1(100,3280) 100,3242.71 30,3172.71 30,301 222,109 499,109 520,130 v1(520,170)
NetR4_2: R4.2 U3.1 | length 177.5
  Top Layer w15: R4.2 120,3522 140.64,3542.64 U3.1
NetR5_1: R5.1 U3.6 | length 279.1
  Top Layer w25: R5.1 110,4060 210,3960 U3.6
NetR6_1: R6.1 U1.17 | length 4274.2
  Top Layer w15: v1@200,240 v1(210,240) 249,240 304.84,295.84 U1.17 ; v1(210,3380) 407.36,3380 520.36,3493 907,3493 934,3520 R6.1
  Bottom Layer w15: v1(210,240) 161.71,240 80,321.71 80,3152 188,3260 188,3358 v1(210,3380)
NetR6_2: R6.2 U4.1 | length 156.6
  Top Layer w15: R6.2 1111,3520 1158.36,3472.64 U4.1
NetR7_2: R7.2 S1.1 S1.2 U1.25 | length 2082.4
  Top Layer w15: U1.25 509.57,276.72 630.38,155.91 1913.91,155.91 1937,179 S1.1 S1.2 1896,606 1872,630 R7.2
NetR8_2: R8.2 S2.3 S2.4 U1.26 | length 1492.9
  Top Layer w15: U1.26 535.75,340.55 535.75,285.9 640.73,180.91 1391.91,180.91 1413,202 S2.3 S2.4 1452,606 1476,630 R8.2
NetR11_1: R11.1 R12.1 T1.3 | length 727.5
  Top Layer w25: T1.3 625,3100 ; R12.1 625,3100 ; R11.1 950,3240 690,3240 625,3175 625,3100
NetR12_2: R12.2 R13.2 T1.2 | length 1003.9
  Top Layer w25: R12.2 875,3040 T1.2 875,2845 950,2770 1270,2770 1385.95,2885.95 R13.2@1519.99,2885.95
NetR14_2: R14.2 U1.7 | length 904.1
  Top Layer w15: U1.7 432.8,702.57 549.22,819 642.42,819 792.42,969 809,969 966,1126 989,1126 1015,1100 R14.2
NetR15_2: R15.2 U1.5 | length 396.4
  Top Layer w15: U1.5 483.98,683.04 569.93,769 699,769 R15.2
NetR16_2: R16.2 U1.3 | length 748.8
  Top Layer w15: U1.3 535.16,663.51 590.64,719 726.36,719 748.36,697 827,697 965,835 965,899 1011,945 R16.2
NetR17_2: R17.2 U1.23 | length 855
  Top Layer w15: U1.23 458.39,418.74 494.64,455 650,455 687,492 687,545.36 788.64,647 847.71,647 975.71,775 R17.2
NetR18_2: R18.2 U1.24 | length 788.5
  Top Layer w15: U1.24 483.98,408.98 505,430 660.36,430 712,481.64 712,535 799,622 858.07,622 926.07,690 R18.2
NetR19_2: R19.2 U1.6 | length 619.8
  Top Layer w15: U1.6 458.39,692.81 559.58,794 652.78,794 802.78,944 854,944 R19.2
NetR20_2: R20.2 U1.4 | length 417.6
  Top Layer w15: U1.4 509.57,673.28 580.29,744 736.71,744 757.71,723 773,723 R20.2
NetR21_2: R21.2 U1.2 | length 656.7
  Top Layer w15: U1.2 560.75,653.75 601,694 716,694 738,672 837.36,672 990,824.64 990,845 1005,860 R21.2
NetR22_2: R22.2 R23.1 U1.21 | length 2052.7
  Top Layer w15: U1.21 407.2,276.44 449,234.64 v1@449,170 ; R22.2 1060,1500 1040,1480 v1(1040,1450) 1118,1450 R23.1
  Bottom Layer w15: v1@449,170 449,244 430,263 430,687.64 755,1012.64 755,1383 772,1400 1024,1400 1040,1416 v1(1040,1450)
  other v1: 450,170
NetT1_6: T1.6 T1.7 | length 250
  Top Layer w40: T1.7 T1.6
pads on no net: U2.3 U2.5 U3.3 U3.5 U4.3 U4.5

## Polygon pours and split planes (outlines as drawn)
no net on Top Overlay "Top Overlay-No Net" (solid): 321.9,3166 313.5,3166 311.62,3162.73 309.48,3159.64 307.06,3156.74 304.41,3154.06 301.53,3151.63 298.45,3149.46 295.2,3147.56 291.79,3145.95 288.25,3144.65 284.61,3143.66 280.91,3142.99 277.15,3142.65 273.38,3142.63 269.63,3142.95 265.91,3143.59 262.27,3144.55 258.72,3145.82 255.3,3147.4 252.03,3149.28 248.94,3151.42 246.04,3153.84 243.36,3156.49 240.93,3159.37 238.76,3162.45 236.86,3165.7 235.25,3169.11 233.95,3172.65 233,3176 324.4,3176 324.36,3176.01 324.95,3181.12 325.09,3186.26 324.78,3191.4 324.03,3196.49 322.83,3201.5 321.2,3206.38 319.16,3211.11 316.71,3215.63 313.87,3219.93 310.67,3223.96 307.13,3227.7 303.28,3231.11 299.15,3234.18 294.76,3236.87 290.16,3239.17 285.37,3241.06 280.44,3242.53 275.39,3243.56 270.28,3244.15 265.14,3244.29 260,3243.98 254.91,3243.23 249.9,3242.03 245.02,3240.4 240.29,3238.36 235.77,3235.91 231.47,3233.07 227.44,3229.87 223.7,3226.33 220.29,3222.48 217.22,3218.35 214.53,3213.96 212.23,3209.36 210.34,3204.57 208.87,3199.64 207.84,3194.59 207.25,3189.48 207.11,3184.34 207.42,3179.2 208.17,3174.11 209.37,3169.1 211,3164.22 213.04,3159.49 215.49,3154.97 218.33,3150.67 221.53,3146.64 225.07,3142.9 228.92,3139.49 233.05,3136.42 237.44,3133.73 242.04,3131.43 246.83,3129.54 251.76,3128.07 256.81,3127.04 261.92,3126.45 267.06,3126.31 272.2,3126.62 277.29,3127.37 282.3,3128.57 287.18,3130.2 291.91,3132.24 296.43,3134.69 300.73,3137.53 304.76,3140.73 308.5,3144.27 311.91,3148.12 314.98,3152.25 317.67,3156.64 319.97,3161.24 321.9,3166
no net on Top Overlay "Top Overlay-No Net" (solid): 135,3187.8 114.1,3187.8 156,3145 198.7,3187.8 174.4,3187.8 174.33,3187.8 174.89,3195.58 176.13,3203.28 178.03,3210.85 180.58,3218.22 183.77,3225.33 187.56,3232.15 191.93,3238.61 196.85,3244.66 202.28,3250.26 208.17,3255.37 214.49,3259.94 221.18,3263.94 228.2,3267.35 235.49,3270.13 242.99,3272.27 250.65,3273.74 258.4,3274.54 266.2,3274.66 273.98,3274.11 281.68,3272.87 289.25,3270.97 296.62,3268.42 303.73,3265.23 310.55,3261.44 317.01,3257.07 323.06,3252.15 328.66,3246.72 333.77,3240.83 338.34,3234.51 342.34,3227.82 345.75,3220.8 347.9,3215.4 372.2,3239.7 385.6,3226.3 385.65,3226.32 381.65,3236.8 376.76,3246.9 371.01,3256.53 364.43,3265.62 357.09,3274.1 349.04,3281.91 340.34,3288.99 331.05,3295.29 321.25,3300.75 311.01,3305.34 300.42,3309.02 289.54,3311.76 278.46,3313.54 267.27,3314.35 256.05,3314.18 244.89,3313.03 233.87,3310.92 223.08,3307.85 212.6,3303.85 202.5,3298.96 192.87,3293.21 183.78,3286.63 175.3,3279.29 167.49,3271.24 160.41,3262.54 154.11,3253.25 148.65,3243.45 144.06,3233.21 140.38,3222.62 137.64,3211.74 135.86,3200.66 135.05,3189.47 135,3187.8
no net on Top Overlay "Top Overlay-No Net" (solid): 393.1,3183.6 414.1,3183.6 372.2,3226.3 329.4,3183.6 353.7,3183.6 353.67,3183.6 353.12,3175.83 351.9,3168.14 350.01,3160.58 347.46,3153.21 344.29,3146.1 340.51,3139.29 336.15,3132.83 331.24,3126.78 325.83,3121.18 319.94,3116.07 313.64,3111.5 306.96,3107.49 299.95,3104.08 292.68,3101.3 285.19,3099.15 277.54,3097.67 269.79,3096.86 262,3096.73 254.23,3097.28 246.54,3098.51 238.98,3100.39 231.61,3102.94 224.5,3106.11 217.69,3109.89 211.23,3114.25 205.18,3119.16 199.58,3124.57 194.47,3130.46 189.9,3136.76 185.89,3143.44 182.48,3150.45 180.3,3155.9 156,3131.6 142.6,3145 142.64,3145.01 146.64,3134.54 151.53,3124.45 157.28,3114.83 163.85,3105.74 171.18,3097.27 179.23,3089.46 187.92,3082.39 197.2,3076.09 206.99,3070.64 217.22,3066.05 227.81,3062.38 238.68,3059.64 249.75,3057.86 260.93,3057.05 272.14,3057.22 283.29,3058.37 294.3,3060.48 305.09,3063.54 315.56,3067.54 325.65,3072.43 335.27,3078.18 344.35,3084.75 352.83,3092.08 360.64,3100.13 367.71,3108.82 374.01,3118.1 379.46,3127.89 384.05,3138.12 387.72,3148.71 390.46,3159.58 392.24,3170.65 393.05,3181.83 393.1,3183.6
GND on Top Layer "Top Layer 5V" (solid, pour order 0): 20,3599 160,3599 160,3562.42 60,3475.05 60,2400 2110,2400 2110,1990 2340,1990 2340,1550 2409.88,1550 2409.88,25 20,25
+5V on Bottom Layer "Bottom Layer 5V" (solid, pour order 2): 20,25 20,2399 2110,2399 2110,1990 2340,1990 2340,1550 2409.88,1550 2409.88,25

## Keep-outs
Top Overlay:
  circle w10: c930,405 r210
  circle w10: c1805,2405 r210

## Other copper
Top Layer:
  region net NetCN1_2: 1550,4050 1640,3960 1690,3960 1580,4070 1550,4070
  region net NetCN1_2: 1493,4040 1603,3930 1653,3930 1543,4040 1513,4040

## Silkscreen, mask and mechanical layers (free items; w line width, h text height)
Top Overlay:
  circle w20: c1707,3188 r133.09
  region: 310,940 310,740 650,740 650,940
  region: 1191.5,3055 1516.5,3055 1516.5,3100 1191.5,3100
  region: 1191.5,3055 1516.5,3055 1516.5,3100 1191.5,3100
  lines w5: 2108,2410 2368,2410 ; 2238,2088 2238,2390
  lines w5.5: 1294.37,3376.64 cw(c1362.4,3271.3) 1349.6,3396.04 ccw(c1362.4,3271.3) 1294.37,3376.64 ; 1388.21,3395.93 cw(c1365.9,3282.1) 1432.72,3376.92 ccw(c1365.9,3282.1) 1388.21,3395.93
  lines w8: 30,200 130,200 130,890 30,890 30,200 ; 1400,1300 2100,1300 2100,1520 1400,1520 1400,1300 ; 1480,240 1870,240 1870,470 1480,470 1480,240 ; 1590,2640 1590,2980 2460,2980 2460,2640 1590,2640 ; 2180,40 2440,40 2440,460 2180,460 2180,40
  lines w12.5: 1386.2,3164.2 ccw(c1408,3164) 1429.8,3164.2 cw(c1408,3164) 1386.2,3164.2 ; 1386.2,3164.3 cw(c1408,3164.5) 1429.8,3164.3 ccw(c1408,3164.5) 1386.2,3164.3
  lines w15: 1614,3282 1801,3095 ; 1311.9,3158.3 1294.4,3376.6 1311.9,3158.3 ; 1311.9,3158.3 1385.4,3158.4 1311.9,3158.3 ; 1312,3364.6 1312,3392 ; 1312,3364.6 1322.5,3364.6 ; 1312,3364.6 1312,3392 ; 1312,3364.6 1322.5,3364.6 ; 1312,3392 1322.5,3392 ; 1312,3392 1322.5,3392 ; 1314.6,3139 1314.6,3158.2 ; 1314.6,3139 1324.3,3139 ; 1314.6,3139 1314.6,3158.2 ; 1314.6,3139 1324.3,3139 ; 1314.6,3158.2 1324.3,3158.2 ; 1314.6,3158.2 1324.3,3158.2 ; 1322.5,3364.6 1322.5,3392 ; 1322.5,3364.6 1322.5,3392 ; 1324.3,3139 1324.3,3158.2 ; 1324.3,3139 1324.3,3158.2 ; 1349,3302.4 1349,3314.1 ; 1349,3302.4 1399.1,3302.4 ; 1349,3302.4 1349,3314.1 ; 1349,3302.4 1399.1,3302.4 ; 1349,3314.1 1399.1,3314.1 ; 1349,3314.1 1399.1,3314.1 ; 1350.5,3389.2 1350.5,3402.5 ; 1350.5,3389.2 1387.6,3389.2 ; 1350.5,3389.2 1350.5,3402.5 ; 1350.5,3389.2 1387.6,3389.2 ; 1350.5,3402.5 1387.6,3402.5 ; 1350.5,3402.5 1387.6,3402.5 ; 1387.6,3389.2 1387.6,3402.5 ; 1387.6,3389.2 1387.6,3402.5 ; 1399.1,3302.4 1399.1,3314.1 ; 1399.1,3302.4 1399.1,3314.1 ; 1429.8,3325.9 1429.8,3349.9 ; 1429.8,3325.9 1452.5,3325.9 ; 1429.8,3325.9 1429.8,3349.9 ; 1429.8,3325.9 1452.5,3325.9 ; 1429.8,3349.9 1452.5,3349.9 ; 1429.8,3349.9 1452.5,3349.9 ; 1452.5,3325.9 1452.5,3349.9 ; 1452.5,3325.9 1452.5,3349.9 ; 1214,3416.3 1494.6,3117 1214,3416.3 ; 1221,3117 1513.5,3417 1221,3117 ; 1279.1,3364.6 1446.3,3364.6 1279.1,3364.6 ; 1418.3,3185.8 1432.7,3376.9 1418.3,3185.8
  lines w18.4: 1402.5,3164.3 ccw(c1408.1,3164.3) 1413.7,3164.3 cw(c1408.1,3164.3) 1402.5,3164.3 ; 1402.5,3164.7 cw(c1408.1,3164.7) 1413.7,3164.7 ccw(c1408.1,3164.7) 1402.5,3164.7
  lines w20: 1436.6,3374.2 ccw(c1442.2,3374.2) 1447.8,3374.2 ; 1436.6,3374.2 cw(c1442.2,3374.2) 1447.8,3374.2 ; 1436.6,3374.2 ccw(c1442.2,3374.2) 1447.8,3374.2 ; 1436.6,3374.2 cw(c1442.2,3374.2) 1447.8,3374.2
  text "1  2    1  2" at 224,3957 h50
  text "1  2  3  4" at 1711,3957 h50
  text "2004/12/EC Directive on Packaging and Packaging Waste" at 430,3210 h40
  text "Pb" at 1630,3142 h160
  text "2004/12/EC Directive sur les emballages et les dechets d'emballage" at 2415,3000 h40 r90
  text "2011/65/EU RoHS" at 2050,2490 h40
  text "5V-A / GND-B / GND-C / GND-D / GND-E" at 2249,2064 h40
  text "P2: / RA / RB / RC.O1 / SET / NS / SLA" at 1948,2039 h40
  text "TH OUT" at 1540,1539 h40
  text "TH IN" at 1841,1539 h40
  text "A / B / C / D / E" at 2352,1500 h60
  text "S.V:" at 519,956 h50
  text "EX384 rev. C03" at 118,214 h60 r90
  text "P1: / 5-CK / 4-DATA / 3-GND / 2-5V / 1-RST" at 2194,55 h40
Mechanical 1:
  the board outline again, w2
Mechanical 13:
  region: 2480,1370 2375,1370 2375,1330 2480,1330
  region: 2480,620 2375,620 2375,580 2480,580
FAB-NOTES: